# Altium PCB PCB1.PcbDoc (part 1 of 8)
Units mil, origin at the board's own origin, x right, y up, seen from the top; angles counter-clockwise.
Board outline 3820 x 2600 mil, 2 copper layers (Top Layer, Bottom Layer); 88 components, 130 nets, 566 pads, 113 vias.
Unrouted connection lines stored in the file: 16.
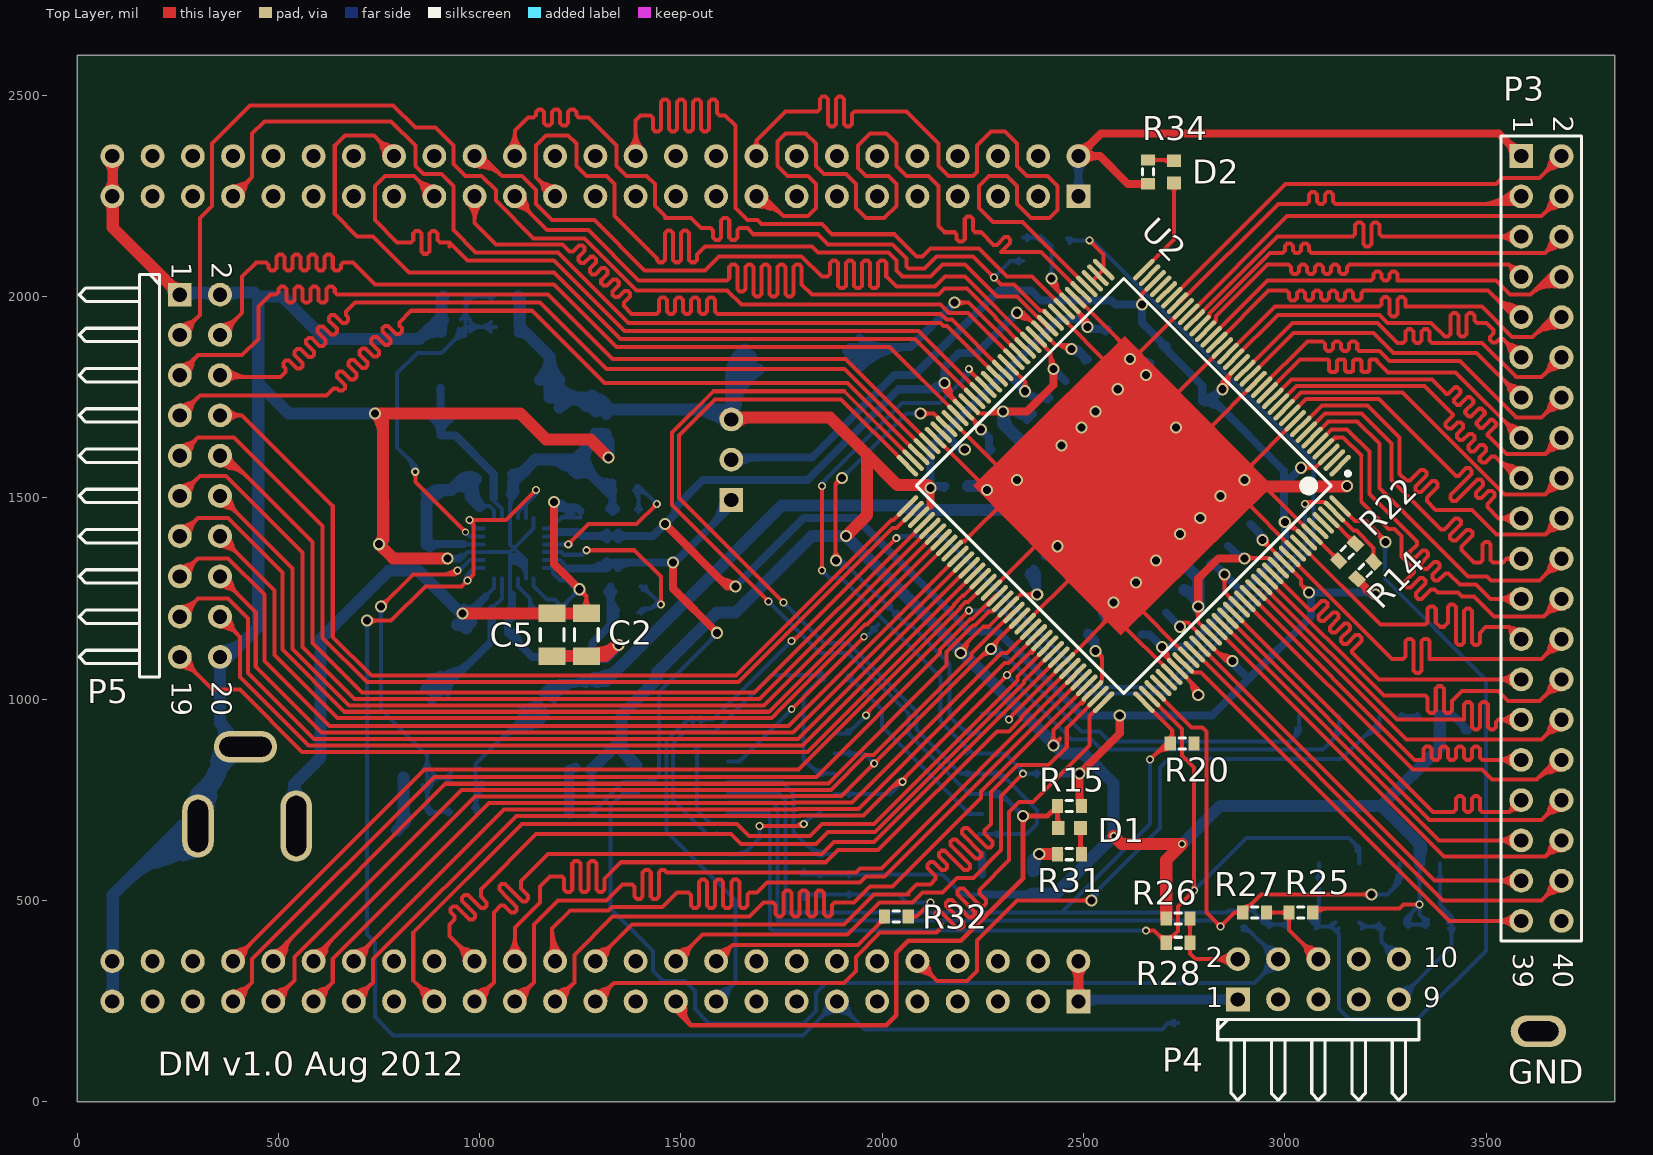
[diagram p0: Top Layer view]
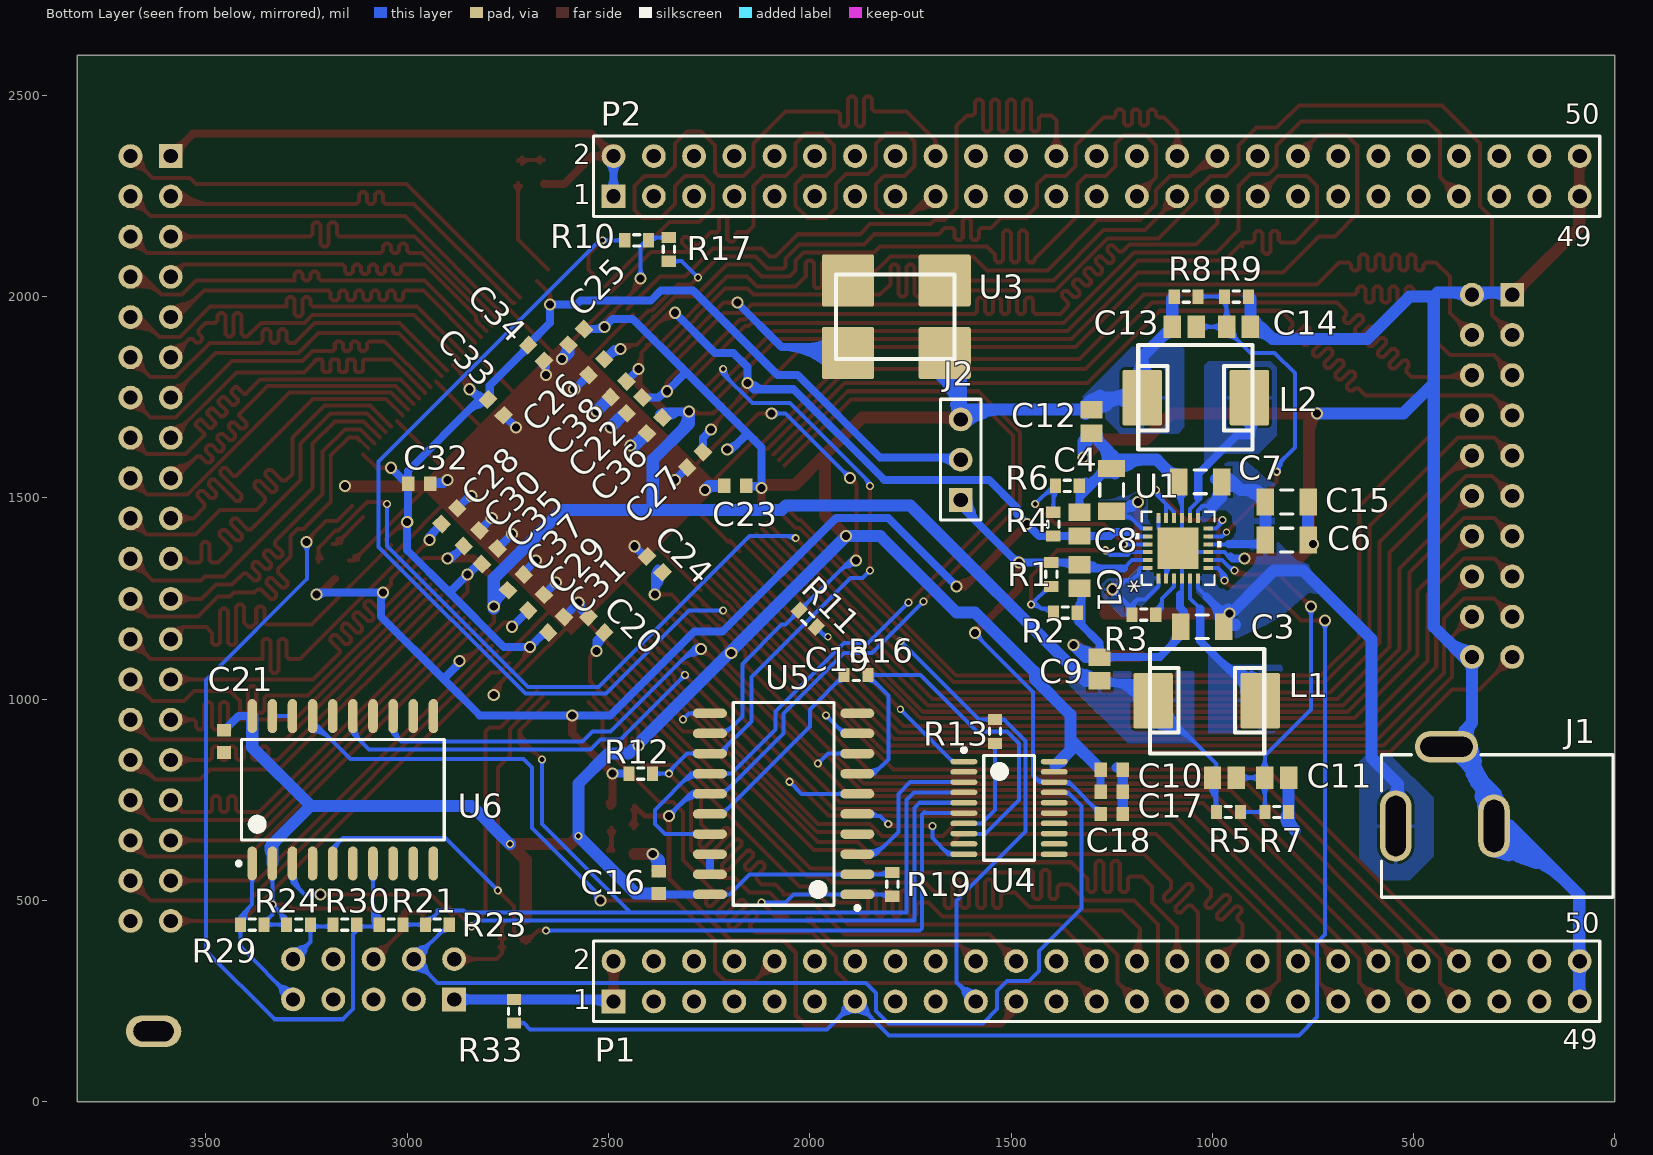
[diagram p1: Bottom Layer view, seen from below]

## Layer stack, top to bottom
Top Layer: signal copper 1.4
Dielectric: dielectric 12.6, FR-4, Dk 4.8
Bottom Layer: signal copper 1.4

## Board outline
0,0 0,2600 3820,2600 3820,0

## Design rules (kind name [scope] priority, off if disabled: settings)
Clearance [All] p1: gap=6
DiffPairsRouting [All] p1: maxlimit=10 minlimit=10 mostfreqgap=10 maxuncoupledlength=500
MatchedLengths MatchedLengths_DIO [InNetClass('DIO')] p1: tolerance=196.85 checknetsindiffpair=TRUE checkdiffpairvsdiffpair=TRUE checkothers=TRUE
MatchedLengths MatchedLengths_FSMC [InNetClass('FSMC')] p2: tolerance=196.85 checknetsindiffpair=TRUE checkdiffpairvsdiffpair=TRUE checkothers=TRUE
MatchedLengths MatchedLengths_ADC2 [InNetClass('ADC2')] p3: tolerance=196.85 checknetsindiffpair=TRUE checkdiffpairvsdiffpair=TRUE checkothers=TRUE
MatchedLengths MatchedLengths_ADC1 [InNetClass('ADC1')] p4: tolerance=196.85 checknetsindiffpair=TRUE checkdiffpairvsdiffpair=TRUE checkothers=TRUE
PolygonConnect [All] p1: connectstyle=Relief reliefconductorwidth=10 reliefentries=4 polygonreliefangle="90 Angle"
RoutingVias [All] p1: holewidth=31.5 width=19.68 viastyle="Through Hole" minholewidth=11.81 minwidth=15.75 maxholewidth=28 maxwidth=50
SilkscreenOverComponentPads [All] p1: minsilkscreentomaskgap=10
SolderMaskExpansion [All] p1: expansion=4
Width [All] p1: maxlimit=60 minlimit=6 preferedwidth=10
26 further rules are at their usual default settings.

## Classes and differential pairs
net class FSMC: FSMC_CLK FSMC_D0 FSMC_D1 FSMC_D2 FSMC_D3 FSMC_D4 FSMC_D5 FSMC_D6 FSMC_D7 FSMC_D8 FSMC_D9 FSMC_D10 FSMC_D11 FSMC_D12 FSMC_D13 FSMC_D14 FSMC_D15 FSMC_NBL0 FSMC_NBL1 FSMC_NE1 FSMC_NL FSMC_NOE FSMC_NWAIT FSMC_NWE
net class ADC2: ADC2_CLK_N ADC2_CLK_P ADC2_D0 ADC2_D1 ADC2_D2 ADC2_D3 ADC2_D4 ADC2_D5 ADC2_D6 ADC2_D7 ADC2_D8 ADC2_D9 ADC2_D10 ADC2_D11 ADC2_D12 ADC2_D13 ADC2_D14 ADC2_D15 ADC2_OF
net class ADC1: ADC1_CLK_N ADC1_CLK_P ADC1_D0 ADC1_D1 ADC1_D2 ADC1_D3 ADC1_D4 ADC1_D5 ADC1_D6 ADC1_D7 ADC1_D8 ADC1_D9 ADC1_D10 ADC1_D11 ADC1_D12 ADC1_D13 ADC1_D14 ADC1_D15 ADC1_OF
net class DIO: DIO_CLK DIO_D0 DIO_D1 DIO_D2 DIO_D3 DIO_D4 DIO_D5 DIO_D6 DIO_D7 DIO_D8 DIO_D9 DIO_D10 DIO_D11 DIO_D12 DIO_D13 DIO_D14 DIO_D15
component class DM_V1_power: C1 C2 C3 C4 C5 C6 C7 C8 C9 C10 C11 C12 C13 C14 C15 J1 L1 L2 R1 R2 R3 R4 R5 R6 R7 R8 R9 R33 U1
component class DM_V1_JTAG_CONF_connectors: C16 C17 C18 C19 C21 D1 P4 R10 R11 R12 R13 R14 R15 R16 R19 R20 R21 R22 R23 R24 R25 R26 R27 R28 R29 R30 R31 U4 U5 U6
component class DM_V1_headers_misc: P1 P2 P3 P5 R17 R32 U3
component class DM_V1_FPGA: C20 C22 C23 C24 C25 C26 C27 C28 C29 C30 C31 C32 C33 C34 C35 C36 C37 C38 D2 J2 R34 U2
differential pair ADC1_CLK: +ADC1_CLK_P -ADC1_CLK_N
differential pair ADC2_CLK: +ADC2_CLK_P -ADC2_CLK_N

## Components (designator, comment, footprint, x,y, rotation, side; value= is the part's Value field where it differs from the comment)
C1 "Cap Semi" C0805 1330,1305 r90 bottom
C2 "Cap Pol3" C1206 1265,1160 r270 top
C3 "Cap Pol3" C1206 1025,1180 r0 bottom
C4 "Cap Pol3" C1206 1250,1520 r90 bottom
C5 "Cap Pol3" C1206 1180,1160 r270 top
C6 "Cap Pol3" C1206 815,1395 r180 bottom
C7 "Cap Pol3" C1206 1030,1540 r0 bottom
C8 "Cap Semi" C0805 1330,1435 r270 bottom
C9 "Cap Semi" C0805 1280,1075 r270 bottom
C10 "Cap Semi" C0805 970,805 r0 bottom
C11 "Cap Semi" C0805 840,805 r0 bottom
C12 "Cap Semi" C0805 1300,1690 r90 bottom
C13 "Cap Semi" C0805 1070,1925 r0 bottom
C14 "Cap Semi" C0805 935,1925 r0 bottom
C15 "Cap Pol3" C1206 815,1490 r180 bottom
C16 "0.1" 1608[0603] 2375,545 r90 bottom
C17 "0.1" 1608[0603] 1250,770 r0 bottom
C18 "0.1" 1608[0603] 1250,715 r180 bottom
C19 "0.1" 1608[0603] 1250,825 r0 bottom
C20 "0.1" 1608[0603] 2530,1185 r225 bottom
C21 "0.1" 1608[0603] 3455,895 r270 bottom
C22 "0.1" 1608[0603] 2435,1730 r135 bottom
C23 "0.1" 1608[0603] 2185,1530 r180 bottom
C24 "0.1" 1608[0603] 2385,1335 r225 bottom
C25 "0.1" 1608[0603] 2580,1900 r135 bottom
C26 "0.1" 1608[0603] 2530,1825 r135 bottom
C27 "0.1" 1608[0603] 2285,1595 r135 bottom
C28 "0.1" 1608[0603] 2895,1455 r315 bottom
C29 "0.1" 1608[0603] 2680,1240 r315 bottom
C30 "0.1" 1608[0603] 2795,1355 r315 bottom
C31 "0.1" 1608[0603] 2630,1185 r315 bottom
C32 "0.1" 1608[0603] 2970,1535 r0 bottom
C33 "0.1" 1608[0603] 2780,1725 r45 bottom
C34 "0.1" 1608[0603] 2680,1860 r45 bottom
C35 "0.1" 1608[0603] 2840,1400 r315 bottom
C36 "0.1" 1608[0603] 2385,1680 r135 bottom
C37 "0.1" 1608[0603] 2730,1290 r315 bottom
C38 "0.1" 1608[0603] 2475,1770 r135 bottom
D1 "LED" 1608[0603] 2465,680 r0 top
D2 "LED" 1608[0603] 2725,2310 r90 top
J1 "PWR2.5" KLD-0202 5,685 r0 bottom
J2 "Header 3" HDR1X3 1625,1495 r90 bottom
L1 "Inductor Iron" "Coil inductor" 1155,865 r180 bottom
L2 "Inductor Iron" "Coil inductor" 900,1880 r0 bottom
P1 "Header 25X2" HDR2X25 2487.4,249.21 r180 bottom
P2 "Header 25X2" HDR2X25 2487.4,2249.21 r180 bottom
P3 "Header 20X2" HDR2X20 3587.4,2349.21 r270 top
P4 "Header 5X2H" HDR2X5H 2883.46,254.21 r0 top
P5 "Header 10X2H" HDR2X10H 255,2005 r270 top
R1 "Res3" J1-0603 1400,1310 r90 bottom
R2 "Res3" J1-0603 1365,1215 r0 bottom
R3 "Res3" J1-0603 1170,1210 r0 bottom
R4 "Res3" J1-0603 1395,1435 r270 bottom
R5 "Res3" J1-0603 960,720 r0 bottom
R6 "Res3" J1-0603 1360,1530 r0 bottom
R7 "Res3" J1-0603 840,720 r0 bottom
R8 "Res3" J1-0603 1065,2000 r0 bottom
R9 "Res3" J1-0603 940,2000 r0 bottom
R10 "Res3" J1-0603 2430,2140 r180 bottom
R11 "Res3" J1-0603 2005,1200 r45 bottom
R12 "Res3" J1-0603 2420,815 r0 bottom
R13 "Res3" J1-0603 1540,920 r90 bottom
R14 "Res3" J1-0603 3200,1320 r225 top
R15 "Res3" J1-0603 2465,735 r0 top
R16 "Res3" J1-0603 1885,1060 r0 bottom
R17 "Res3" J1-0603 2350,2117.56 r270 bottom
R19 "Res3" J1-0603 1795,540 r270 bottom
R20 "Res3" J1-0603 2745,890 r0 top
R21 "Res3" J1-0603 3040,440 r0 bottom
R22 "Res3" J1-0603 3155,1365 r45 top
R23 "Res3" J1-0603 2925,440 r180 bottom
R24 "Res3" J1-0603 3270,440 r180 bottom
R25 "Res3" J1-0603 3040,470 r180 top
R26 "Res3" J1-0603 2735,455 r0 top
R27 "Res3" J1-0603 2925,470 r0 top
R28 "Res3" J1-0603 2735,395 r0 top
R29 "Res3" J1-0603 3385,440 r0 bottom
R30 "Res3" J1-0603 3155,440 r0 bottom
R31 "Res3" J1-0603 2465,615 r0 top
R32 "Res3" J1-0603 2035,460 r180 top
R33 "Res3" J1-0603 2735,225 r270 bottom
R34 "Res3" J1-0603 2660,2310 r270 top
U1 "LM26480_RTW_24" SQA24A 1085,1375 r90 bottom
U2 "XC3S400-4TQG144C" TQG144_N 2600,1530 r225 top
U3 "ActiveOsc5x7" ACT_OSC 1885,1870 r180 bottom
U4 "XCF02SVOG20C" VOG20_N 1505,730 r180 bottom
U5 "74HC244D" SOP127P1030X265-20N 2065,740 r0 bottom
U6 "74HC244D" SOP127P1030X265-20N 3160,775 r90 bottom

## Footprints (in the part's own frame and the unit in brackets; to place one, negate y for a bottom-side part, rotate by r counter-clockwise, add the part's x,y. Pads: shape width x height; smd on the part's side, far side on the other; paste and mask are expansions set on the pad)
1608[0603] [mm] "Chip Capacitor, Body 1.6x0.8mm, IPC High Density"
  rect 0.8x0.9 smd: 1(-0.7,0) 2(0.7,0)
  body extent -0.87,-0.48 0.87,0.48, height 1.3
ACT_OSC [mil] "Active_oscillator"
  rrect10% 130x130 smd: 1(220,170) 2(-20,170) 3(-20,-10) 4(220,-10)
  silkscreen extent -50,-25 245,185
C0805 [mm] "Chip Capacitor, Body 2.0x1.3mm, IPC High Density"
  rect 1.1x1.4 smd: 1(-0.75,0) 2(0.75,0)
  body extent -1.1,-0.72 1.1,0.72, height 1.4
C1206 [mm] "Chip Capacitor, Body 3.2x1.6mm, IPC High Density"
  rect 1.1x1.7 smd: 1(-1.35,0) 2(1.35,0)
  silkscreen extent -0.4,-0.75 0.4,0.75, body extent -1.7,-0.9 1.7,0.9, height 1.3
"Coil inductor" [mil] "High-current coil inductor"
  rrect10% 98.43x137.8 smd: 1(8,131) 2(274,131)
  silkscreen extent 0,0 284,260
HDR1X3 [mm] "Connector; Header; 3 Position"
  rect 1.5x1.5 hole 0.9: 1(0,0)
  round 1.5 hole 0.9: 2(2.54,0) 3(5.08,0)
  silkscreen extent -1.27,-1.27 6.35,1.27
HDR2X5H [mm] "Connector; Header; 5x2 Position; Right Angle"
  rect 1.5x1.5 hole 0.9: 1(0,0)
  round 1.5 hole 0.9: 2(0,2.54) 3(2.54,0) 4(2.54,2.54) 5(5.08,0) 6(5.08,2.54) 7(7.62,0) 8(7.62,2.54) 9(10.16,0) 10(10.16,2.54)
  silkscreen extent -1.27,-6.35 11.43,-1.27
HDR2X10H [mm] "Connector; Header; 10x2 Position; Right Angle"
  rect 1.5x1.5 hole 0.9: 1(0,0)
  round 1.5 hole 0.9: 2(0,2.54) 3(2.54,0) 4(2.54,2.54) 5(5.08,0) 6(5.08,2.54) 7(7.62,0) 8(7.62,2.54) 9(10.16,0) 10(10.16,2.54) 11(12.7,0) 12(12.7,2.54) 13(15.24,0) 14(15.24,2.54) 15(17.78,0) 16(17.78,2.54) 17(20.32,0) 18(20.32,2.54) 19(22.86,0) 20(22.86,2.54)
  silkscreen extent -1.27,-6.35 24.13,-1.27
HDR2X20 [mm] "Connector; Header; 20x2 Position"
  rect 1.5x1.5 hole 0.9: 1(0,0)
  round 1.5 hole 0.9: 2(0,2.54) 3(2.54,0) 4(2.54,2.54) 5(5.08,0) 6(5.08,2.54) 7(7.62,0) 8(7.62,2.54) 9(10.16,0) 10(10.16,2.54) 11(12.7,0) 12(12.7,2.54) 13(15.24,0) 14(15.24,2.54) 15(17.78,0) 16(17.78,2.54) 17(20.32,0) 18(20.32,2.54) 19(22.86,0) 20(22.86,2.54) 21(25.4,0) 22(25.4,2.54) 23(27.94,0) 24(27.94,2.54) 25(30.48,0) 26(30.48,2.54) 27(33.02,0) 28(33.02,2.54) 29(35.56,0) 30(35.56,2.54) 31(38.1,0) 32(38.1,2.54) 33(40.64,0) 34(40.64,2.54) 35(43.18,0) 36(43.18,2.54) 37(45.72,0) 38(45.72,2.54) 39(48.26,0) 40(48.26,2.54)
  silkscreen extent -1.27,-1.27 49.53,3.81
HDR2X25 [mm] "Connector; Header; 25x2 Position"
  rect 1.5x1.5 hole 0.9: 1(0,0)
  round 1.5 hole 0.9: 2(0,2.54) 3(2.54,0) 4(2.54,2.54) 5(5.08,0) 6(5.08,2.54) 7(7.62,0) 8(7.62,2.54) 9(10.16,0) 10(10.16,2.54) 11(12.7,0) 12(12.7,2.54) 13(15.24,0) 14(15.24,2.54) 15(17.78,0) 16(17.78,2.54) 17(20.32,0) 18(20.32,2.54) 19(22.86,0) 20(22.86,2.54) 21(25.4,0) 22(25.4,2.54) 23(27.94,0) 24(27.94,2.54) 25(30.48,0) 26(30.48,2.54) 27(33.02,0) 28(33.02,2.54) 29(35.56,0) 30(35.56,2.54) 31(38.1,0) 32(38.1,2.54) 33(40.64,0) 34(40.64,2.54) 35(43.18,0) 36(43.18,2.54) 37(45.72,0) 38(45.72,2.54) 39(48.26,0) 40(48.26,2.54) 41(50.8,0) 42(50.8,2.54) 43(53.34,0) 44(53.34,2.54) 45(55.88,0) 46(55.88,2.54) 47(58.42,0) 48(58.42,2.54) 49(60.96,0) 50(60.96,2.54)
  silkscreen extent -1.27,-1.27 62.23,3.81
J1-0603 [mm] "Chip Resistor, Body 1.6x0.8mm, IPC High Density"
  rect 0.7x0.9 smd: 1(-0.75,0) 2(0.75,0)
  silkscreen extent -0.2,-0.35 0.2,0.35, body extent -0.85,-0.48 0.85,0.48, height 0.9
KLD-0202 [mm] "DC Power Jack, 2.5mm, KLD Series, PCB Mount"
  oval 2x4.5 hole 1.27 slot 3.81 at 90 deg: 1(13.7,0)
  round 1.5 hole 1: 1A(13.7,-1.25) 1B(13.7,1.25) 2A(7.5,-1) 2B(7.5,1) 3A(9.5,-5) 3B(11.5,-5)
  oval 2x4 hole 1.27 slot 3.302 at 90 deg: 2(7.5,0)
  oval 4x2 hole 1.27 slot 3.302 at 0 deg: 3(10.5,-5)
  silkscreen extent 0,-4.5 14.6,4.5
SOP127P1030X265-20N [mm] "SOP, 20-Leads, Body 12.8x7.5mm (max), Pitch 1.27mm, IPC Medium Density"
  oval 2.15x0.6 smd: 1(-4.65,5.715) 2(-4.65,4.445) 3(-4.65,3.175) 4(-4.65,1.905) 5(-4.65,0.635) 6(-4.65,-0.635) 7(-4.65,-1.905) 8(-4.65,-3.175) 9(-4.65,-4.445) 10(-4.65,-5.715) 11(4.65,-5.715) 12(4.65,-4.445) 13(4.65,-3.175) 14(4.65,-1.905) 15(4.65,-0.635) 16(4.65,0.635) 17(4.65,1.905) 18(4.65,3.175) 19(4.65,4.445) 20(4.65,5.715)
  silkscreen extent -4.77,-6.4 3.17,6.69, body extent -3.75,-6.4 3.75,6.4, height 2.65
SQA24A [mil]
  rect 24x10 smd paste-5: 1(-75,49.21) 2(-75,29.53) 3(-75,9.84) 4(-75,-9.84) 5(-75,-29.53) 6(-75,-49.21) 13(75,-49.21) 14(75,-29.53) 15(75,-9.84) 16(75,9.84) 17(75,29.53) 18(75,49.21)
  rect 10x24 smd paste-5: 7(-49.21,-75) 8(-29.53,-75) 9(-9.84,-75) 10(9.84,-75) 11(29.53,-75) 12(49.21,-75) 19(49.21,75) 20(29.53,75) 21(9.84,75) 22(-9.84,75) 23(-29.53,75) 24(-49.21,75)
  rect 102x102 smd paste-51: 25(0,0)
  silkscreen extent -90,-107 90,107
TQG144_N [mm] "Thin QFP, 144-Leads, Body 20x20mm, Pitch 0.5mm, IPC Medium Density"
  oval 1.8x0.3 smd: 1(-10.55,8.75) 2(-10.55,8.25) 3(-10.55,7.75) 4(-10.55,7.25) 5(-10.55,6.75) 6(-10.55,6.25) 7(-10.55,5.75) 8(-10.55,5.25) 9(-10.55,4.75) 10(-10.55,4.25) 11(-10.55,3.75) 12(-10.55,3.25) 13(-10.55,2.75) 14(-10.55,2.25) 15(-10.55,1.75) 16(-10.55,1.25) 17(-10.55,0.75) 18(-10.55,0.25) 19(-10.55,-0.25) 20(-10.55,-0.75) 21(-10.55,-1.25) 22(-10.55,-1.75) 23(-10.55,-2.25) 24(-10.55,-2.75) 25(-10.55,-3.25) 26(-10.55,-3.75) 27(-10.55,-4.25) 28(-10.55,-4.75) 29(-10.55,-5.25) 30(-10.55,-5.75) 31(-10.55,-6.25) 32(-10.55,-6.75) 33(-10.55,-7.25) 34(-10.55,-7.75) 35(-10.55,-8.25) 36(-10.55,-8.75) 73(10.55,-8.75) 74(10.55,-8.25) 75(10.55,-7.75) 76(10.55,-7.25) 77(10.55,-6.75) 78(10.55,-6.25) 79(10.55,-5.75) 80(10.55,-5.25) 81(10.55,-4.75) 82(10.55,-4.25) 83(10.55,-3.75) 84(10.55,-3.25) 85(10.55,-2.75) 86(10.55,-2.25) 87(10.55,-1.75) 88(10.55,-1.25) 89(10.55,-0.75) 90(10.55,-0.25) 91(10.55,0.25) 92(10.55,0.75) 93(10.55,1.25) 94(10.55,1.75) 95(10.55,2.25) 96(10.55,2.75) 97(10.55,3.25) 98(10.55,3.75) 99(10.55,4.25) 100(10.55,4.75) 101(10.55,5.25) 102(10.55,5.75) 103(10.55,6.25) 104(10.55,6.75) 105(10.55,7.25) 106(10.55,7.75) 107(10.55,8.25) 108(10.55,8.75)
  oval 0.3x1.8 smd: 37(-8.75,-10.55) 38(-8.25,-10.55) 39(-7.75,-10.55) 40(-7.25,-10.55) 41(-6.75,-10.55) 42(-6.25,-10.55) 43(-5.75,-10.55) 44(-5.25,-10.55) 45(-4.75,-10.55) 46(-4.25,-10.55) 47(-3.75,-10.55) 48(-3.25,-10.55) 49(-2.75,-10.55) 50(-2.25,-10.55) 51(-1.75,-10.55) 52(-1.25,-10.55) 53(-0.75,-10.55) 54(-0.25,-10.55) 55(0.25,-10.55) 56(0.75,-10.55) 57(1.25,-10.55) 58(1.75,-10.55) 59(2.25,-10.55) 60(2.75,-10.55) 61(3.25,-10.55) 62(3.75,-10.55) 63(4.25,-10.55) 64(4.75,-10.55) 65(5.25,-10.55) 66(5.75,-10.55) 67(6.25,-10.55) 68(6.75,-10.55) 69(7.25,-10.55) 70(7.75,-10.55) 71(8.25,-10.55) 72(8.75,-10.55) 109(8.75,10.55) 110(8.25,10.55) 111(7.75,10.55) 112(7.25,10.55) 113(6.75,10.55) 114(6.25,10.55) 115(5.75,10.55) 116(5.25,10.55) 117(4.75,10.55) 118(4.25,10.55) 119(3.75,10.55) 120(3.25,10.55) 121(2.75,10.55) 122(2.25,10.55) 123(1.75,10.55) 124(1.25,10.55) 125(0.75,10.55) 126(0.25,10.55) 127(-0.25,10.55) 128(-0.75,10.55) 129(-1.25,10.55) 130(-1.75,10.55) 131(-2.25,10.55) 132(-2.75,10.55) 133(-3.25,10.55) 134(-3.75,10.55) 135(-4.25,10.55) 136(-4.75,10.55) 137(-5.25,10.55) 138(-5.75,10.55) 139(-6.25,10.55) 140(-6.75,10.55) 141(-7.25,10.55) 142(-7.75,10.55) 143(-8.25,10.55) 144(-8.75,10.55)
  silkscreen extent -10.67,-9.25 9.25,9.57, body extent -10,-10 10,10, height 1.6
VOG20_N [mm] "TSOP, 20-Leads, Body 6.5x4.4mm, Pitch 0.65mm, IPC Medium Density"
  oval 1.7x0.35 smd: 1(-2.85,2.925) 2(-2.85,2.275) 3(-2.85,1.625) 4(-2.85,0.975) 5(-2.85,0.325) 6(-2.85,-0.325) 7(-2.85,-0.975) 8(-2.85,-1.625) 9(-2.85,-2.275) 10(-2.85,-2.925) 11(2.85,-2.925) 12(2.85,-2.275) 13(2.85,-1.625) 14(2.85,-0.975) 15(2.85,-0.325) 16(2.85,0.325) 17(2.85,0.975) 18(2.85,1.625) 19(2.85,2.275) 20(2.85,2.925)
  silkscreen extent -2.98,-3.3 1.6,3.77, body extent -2.25,-3.3 2.25,3.3, height 1.2

## Part data
C1 C8 C9 C10 C11 C12 C13 C14: "Capacitor (Semiconductor SIM Model)"
C2 C3 C4 C5 C6 C7 C15: "Polarized Capacitor (Surface Mount)"
C16 C17 C18 C19 C20 C21 C22 C23 C24 C25 C26 C27 C28 C29 C30 C31 C32 C33 C34 C35 C36 C37 C38: library part "CC0603-0.1MKF X7R", "Ceramic Chip-capacitor 0603"
D1 D2: library part LED2, "Typical RED, GREEN, YELLOW, AMBER GaAs LED"
J1: "Low Voltage Power Supply Connector"
J2: "Header, 3-Pin"
L1 L2: "Magnetic-Core Inductor"
P1 P2: "Header, 25-Pin, Dual row"
P3: "Header, 20-Pin, Dual row"
P4: "Header, 5-Pin, Dual row, Right Angle"
P5: "Header, 10-Pin, Dual row, Right Angle"
R1 R2 R3 R4 R5 R6 R7 R8 R9 R10 R11 R12 R13 R14 R15 R16 R17 R19 R20 R21 R22 R23 R24 R25 R26 R27 R28 R29 R30 R31 R32 R33 R34: "Resistor"
U1: "Imported"
U2: "Spartan-3 1.2V FPGA, 97 User I/Os, 144-Pin TQFP, Standard Performance, Commercial Grade, Pb-Free"
U4: "XCF00S Series, Platform Flash In-System Programmable Configuration 3.3V PROM, 20-Pin TSOP, 2-Megabit, Commercial Grade, Pb-Free"
U5 U6: library part 74ALVC244PW, "Octal Buffer/Driver Noninverting 3-State Output"

## Free pads (board coordinates)
  rrect100% 137.8x78.74 hole 50 slot 100 at 0 deg: 0(3630,175)

## Via types
v1: diameter 30, hole 20, Top Layer to Bottom Layer, 74 vias
v2: diameter 20, hole 12, Top Layer to Bottom Layer, 36 vias
v3: diameter 17.72, hole 11.81, Top Layer to Bottom Layer, 3 vias

## Nets (pads, with @x,y where several pads share a name; then routed paths per layer and width w, separated by ;. In a path a pad name is that pad's centre, name@x,y a point inside that pad or via, vN(x,y) a via of type N, cw(c..) or ccw(c..) an arc to the next point about the centre after c; other vN are vias at no path point)
+1.2V: C9.2 C10.2 C35.2 C36.2 C37.2 C38.2 L1.1 R5.2 U2.49 U2.61 U2.121 U2.133 | length 11650.9
  Top Layer w10: U2.61@2215.82,1733.22 2239.69,1709.36 2294.36,1709.36 v1(2300,1715) ; U2.49@2382.86,1900.26 2382.86,1896.33 2417.5,1861.68 ; v1@2417.5,1827.5 2417.5,1861.68 ; v1(2785,1230) 2785,1191.89 U2.121@2817.14,1159.74 ; v1(2900,1350) 2900.64,1350.64 2960.31,1350.64 U2.133@2984.18,1326.78 ; U2.61@2237.34,1712.99 ccw(c2246.1,1721.74) 2246.1,1709.36 ; U2.61@2237.34,1712.99 ccw(c2246.1,1721.74) 2246.1,1709.36 ; U2.61@2237.34,1712.99 ccw(c2246.1,1721.74) 2246.1,1709.36 ; 2262.24,1709.36 ccw(c2262.24,1752.76) v1@2292.93,1722.07 ; 2262.24,1709.36 ccw(c2262.24,1752.76) v1@2292.93,1722.07 ; 2262.24,1709.36 ccw(c2262.24,1752.76) v1@2292.93,1722.07 ; U2.49@2404.64,1879.38 ccw(c2416.32,1879.38) 2408.06,1871.12 ; U2.49@2404.64,1879.38 ccw(c2416.32,1879.38) 2408.06,1871.12 ; U2.49@2404.64,1879.38 ccw(c2416.32,1879.38) 2408.06,1871.12 ; 2417.5,1837.86 ccw(c2442.52,1837.86) v1(2425,1820) ; 2417.5,1837.86 ccw(c2442.52,1837.86) v1(2425,1820) ; 2417.5,1837.86 ccw(c2442.52,1837.86) v1(2425,1820) ; 2417.5,1861.68 ccw(c2465.89,1861.68) v1@2432,1827.14 ; 2417.5,1861.68 ccw(c2465.89,1861.68) v1@2432,1827.14 ; 2417.5,1861.68 ccw(c2465.89,1861.68) v1@2432,1827.14 ; v1@2418.88,1827.91 ccw(c2411.23,1837.77) 2421.98,1844.12 ; v1@2418.88,1827.91 ccw(c2411.23,1837.77) 2421.98,1844.12 ; v1@2418.88,1827.91 ccw(c2411.23,1837.77) 2421.98,1844.12 ; v1@2777.93,1222.93 cw(c2760.86,1205.86) 2785,1205.86 ; v1@2777.93,1222.93 cw(c2760.86,1205.86) 2785,1205.86 ; v1@2777.93,1222.93 cw(c2760.86,1205.86) 2785,1205.86 ; 2785,1205.86 cw(c2809.14,1205.86) v1@2792.07,1222.93 ; 2785,1205.86 cw(c2809.14,1205.86) v1@2792.07,1222.93 ; 2785,1205.86 cw(c2809.14,1205.86) v1@2792.07,1222.93 ; v1@2907.07,1342.93 cw(c2925.69,1324.31) 2925.69,1350.64 ; v1@2907.07,1342.93 cw(c2925.69,1324.31) 2925.69,1350.64 ; v1@2907.07,1342.93 cw(c2925.69,1324.31) 2925.69,1350.64 ; v1@2907.07,1357.07 ccw(c2922.6,1372.6) 2922.6,1350.64 ; v1@2907.07,1357.07 ccw(c2922.6,1372.6) 2922.6,1350.64 ; v1@2907.07,1357.07 ccw(c2922.6,1372.6) 2922.6,1350.64 ; 2953.9,1350.64 cw(c2953.9,1338.26) U2.133@2962.66,1347.01 ; 2953.9,1350.64 cw(c2953.9,1338.26) U2.133@2962.66,1347.01 ; 2953.9,1350.64 cw(c2953.9,1338.26) U2.133@2962.66,1347.01
  Top Layer w20: v1(2300,1715) 2360,1715 2425,1780 v1(2425,1820) ; v1(2785,1230) 2785,1300 2835,1350 v1(2900,1350)
  Bottom Layer w10: R5.2@989.53,720 989.53,805 989.53,838.92 ; L1.1@1163,980 L1.1@1147,996 ; R5.2@983.32,730.15 ccw(c968.33,745.13) 989.53,745.13 ; R5.2@983.32,730.15 ccw(c968.33,745.13) 989.53,745.13 ; R5.2@983.32,730.15 ccw(c968.33,745.13) 989.53,745.13 ; R5.2@984.85,731.37 ccw(c977.92,742.38) 990.61,739.49 ; R5.2@984.85,731.37 ccw(c977.92,742.38) 990.61,739.49 ; R5.2@984.85,731.37 ccw(c977.92,742.38) 990.61,739.49 ; R5.2@984.85,731.37 ccw(c977.92,742.38) 990.61,739.49 ; R5.2@984.85,731.37 ccw(c977.92,742.38) 990.61,739.49 ; R5.2@989.53,734.75 cw(c1063.87,734.75) C10.2@1011.3,787.32 ; R5.2@989.53,734.75 cw(c1063.87,734.75) C10.2@1011.3,787.32 ; R5.2@989.53,734.75 cw(c1063.87,734.75) C10.2@1011.3,787.32 ; 989.53,745.13 ccw(c1010.72,745.13) R5.2@995.74,730.15 ; 989.53,745.13 ccw(c1010.72,745.13) R5.2@995.74,730.15 ; 989.53,745.13 ccw(c1010.72,745.13) R5.2@995.74,730.15 ; 989.53,758.89 cw(c1039.73,758.89) C10.2@1004.23,794.39 ; 989.53,758.89 cw(c1039.73,758.89) C10.2@1004.23,794.39 ; 989.53,758.89 cw(c1039.73,758.89) C10.2@1004.23,794.39 ; 989.53,838.92 ccw(c1000.93,838.92) C10.2@1000.36,827.54 ; 989.53,838.92 ccw(c1000.93,838.92) C10.2@1000.36,827.54 ; 989.53,838.92 ccw(c1000.93,838.92) C10.2@1000.36,827.54 ; 989.53,838.92 1146.6,996 L1.1@1147,996 ; C10.2@990.64,785.01 cw(c986.72,778.78) 993.09,775.1 ; C10.2@990.64,785.01 cw(c986.72,778.78) 993.09,775.1 ; C10.2@990.64,785.01 cw(c986.72,778.78) 993.09,775.1 ; C10.2@990.87,784.87 cw(c982.1,770.46) 996.71,762.03 ; C10.2@990.87,784.87 cw(c982.1,770.46) 996.71,762.03 ; C10.2@990.87,784.87 cw(c982.1,770.46) 996.71,762.03 ; 993.09,775.1 cw(c1007.48,766.79) C10.2@1003.51,782.92 ; 993.09,775.1 cw(c1007.48,766.79) C10.2@1003.51,782.92 ; 993.09,775.1 cw(c1007.48,766.79) C10.2@1003.51,782.92 ; 993.17,750.78 ccw(c1021.82,744.27) R5.2@996.96,728.61 ; 993.17,750.78 ccw(c1021.82,744.27) R5.2@996.96,728.61 ; 993.17,750.78 ccw(c1021.82,744.27) R5.2@996.96,728.61 ; 993.17,750.78 ccw(c1021.82,744.27) R5.2@996.96,728.61 ; 993.17,750.78 ccw(c1021.82,744.27) R5.2@996.96,728.61 ; C10.2@996.07,793.41 cw(c987.42,779.21) 1001.82,770.9 ; C10.2@996.07,793.41 cw(c987.42,779.21) 1001.82,770.9 ; C10.2@996.07,793.41 cw(c987.42,779.21) 1001.82,770.9 ; 1037.24,886.64 cw(c1147,776.88) L1.1@1147,932.1 ; 1037.24,886.64 cw(c1147,776.88) L1.1@1147,932.1 ; 1037.24,886.64 cw(c1147,776.88) L1.1@1147,932.1 ; 1054.31,903.71 cw(c1147,811.02) L1.1@1147,942.1 ; 1054.31,903.71 cw(c1147,811.02) L1.1@1147,942.1 ; 1054.31,903.71 cw(c1147,811.02) L1.1@1147,942.1 ; 1071.38,920.78 cw(c1147,845.17) L1.1@1147,952.1 ; 1071.38,920.78 cw(c1147,845.17) L1.1@1147,952.1 ; 1071.38,920.78 cw(c1147,845.17) L1.1@1147,952.1 ; 1085.72,935.12 ccw(c1044.53,976.32) L1.1@1102.79,976.32 ; 1085.72,935.12 ccw(c1044.53,976.32) L1.1@1102.79,976.32 ; 1085.72,935.12 ccw(c1044.53,976.32) L1.1@1102.79,976.32 ; 1086.55,918.24 ccw(c1065.59,1009.6) L1.1@1152.36,974.12 ; 1086.55,918.24 ccw(c1065.59,1009.6) L1.1@1152.36,974.12 ; 1086.55,918.24 ccw(c1065.59,1009.6) L1.1@1152.36,974.12 ; 1088.46,937.85 cw(c1147,879.31) L1.1@1147,962.1 ; 1088.46,937.85 cw(c1147,879.31) L1.1@1147,962.1 ; 1088.46,937.85 cw(c1147,879.31) L1.1@1147,962.1 ; 1093.16,927.68 ccw(c1074.94,995.68) L1.1@1142.93,977.41 ; 1093.16,927.68 ccw(c1074.94,995.68) L1.1@1142.93,977.41 ; 1093.16,927.68 ccw(c1074.94,995.68) L1.1@1142.93,977.41 ; 1096.49,952.8 cw(c1147.72,939.07) L1.1@1146.7,992.1 ; 1096.49,952.8 cw(c1147.72,939.07) L1.1@1146.7,992.1 ; 1096.49,952.8 cw(c1147.72,939.07) L1.1@1146.7,992.1 ; L1.1@1098.19,939.02 ccw(c1085.89,984.9) L1.1@1132.93,978.29 ; L1.1@1098.19,939.02 ccw(c1085.89,984.9) L1.1@1132.93,978.29 ; L1.1@1098.19,939.02 ccw(c1085.89,984.9) L1.1@1132.93,978.29 ; L1.1@1102.8,952.19 ccw(c1078.67,976.32) L1.1@1112.79,976.32 ; L1.1@1102.8,952.19 ccw(c1078.67,976.32) L1.1@1112.79,976.32 ; L1.1@1102.8,952.19 ccw(c1078.67,976.32) L1.1@1112.79,976.32 ; L1.1@1104.49,940.71 cw(c1111.45,914.74) L1.1@1124.89,938.03 ; L1.1@1104.49,940.71 cw(c1111.45,914.74) L1.1@1124.89,938.03 ; L1.1@1104.49,940.71 cw(c1111.45,914.74) L1.1@1124.89,938.03 ; 1105.33,922.55 ccw(c1087.41,1000.68) L1.1@1161.61,970.34 ; 1105.33,922.55 ccw(c1087.41,1000.68) L1.1@1161.61,970.34 ; 1105.33,922.55 ccw(c1087.41,1000.68) L1.1@1161.61,970.34 ; L1.1@1109.91,932.16 ccw(c1094.28,990.49) L1.1@1152.59,974.81 ; L1.1@1109.91,932.16 ccw(c1094.28,990.49) L1.1@1152.59,974.81 ; L1.1@1109.91,932.16 ccw(c1094.28,990.49) L1.1@1152.59,974.81 ; 1124.12,926.85 ccw(c1109.23,991.76) L1.1@1170.87,966.55 ; 1124.12,926.85 ccw(c1109.23,991.76) L1.1@1170.87,966.55 ; 1124.12,926.85 ccw(c1109.23,991.76) L1.1@1170.87,966.55 ; L1.1@1147,996 1196.47,1045.47 ; L1.1@1150.58,1013.46 cw(c1208.11,977.77) 1208.11,1045.47 ; L1.1@1150.58,1013.46 cw(c1208.11,977.77) 1208.11,1045.47 ; L1.1@1150.58,1013.46 cw(c1208.11,977.77) 1208.11,1045.47 ; L1.1@1159.08,1008.19 cw(c1226.08,966.62) 1226.08,1045.47 ; L1.1@1159.08,1008.19 cw(c1226.08,966.62) 1226.08,1045.47 ; L1.1@1159.08,1008.19 cw(c1226.08,966.62) 1226.08,1045.47 ; L1.1@1167.57,1002.92 cw(c1244.05,955.47) 1244.05,1045.47 ; L1.1@1167.57,1002.92 cw(c1244.05,955.47) 1244.05,1045.47 ; L1.1@1167.57,1002.92 cw(c1244.05,955.47) 1244.05,1045.47 ; L1.1@1176.07,997.65 cw(c1262.02,944.32) C9.2@1262.02,1045.47 ; L1.1@1176.07,997.65 cw(c1262.02,944.32) C9.2@1262.02,1045.47 ; L1.1@1176.07,997.65 cw(c1262.02,944.32) C9.2@1262.02,1045.47 ; L1.1@1184.57,992.38 cw(c1280,933.17) C9.2@1280,1045.47 ; L1.1@1184.57,992.38 cw(c1280,933.17) C9.2@1280,1045.47 ; L1.1@1184.57,992.38 cw(c1280,933.17) C9.2@1280,1045.47 ; L1.1@1190.28,1024.72 cw(c1212.57,1029.37) 1196.47,1045.47 ; L1.1@1190.28,1024.72 cw(c1212.57,1029.37) 1196.47,1045.47 ; L1.1@1190.28,1024.72 cw(c1212.57,1029.37) 1196.47,1045.47 ; L1.1@1191.19,1014.28 cw(c1218.07,1013.43) 1199.66,1033.04 ; L1.1@1191.19,1014.28 cw(c1218.07,1013.43) 1199.66,1033.04 ; L1.1@1191.19,1014.28 cw(c1218.07,1013.43) 1199.66,1033.04 ; 1196.47,1045.47 C9.2@1280,1045.47 ; 1228.77,1038.84 cw(c1238.14,991.89) C9.2@1264.82,1031.64 ; 1228.77,1038.84 cw(c1238.14,991.89) C9.2@1264.82,1031.64 ; 1228.77,1038.84 cw(c1238.14,991.89) C9.2@1264.82,1031.64 ; 1228.77,1038.84 cw(c1238.14,991.89) C9.2@1264.82,1031.64 ; 1228.77,1038.84 cw(c1238.14,991.89) C9.2@1264.82,1031.64 ; 1232.09,1032.72 ccw(c1220.42,1076.58) C9.2@1259.69,1053.82 ; 1232.09,1032.72 ccw(c1220.42,1076.58) C9.2@1259.69,1053.82 ; 1232.09,1032.72 ccw(c1220.42,1076.58) C9.2@1259.69,1053.82 ; 1232.09,1032.72 ccw(c1220.42,1076.58) C9.2@1259.69,1053.82 ; 1232.09,1032.72 ccw(c1220.42,1076.58) C9.2@1259.69,1053.82 ; 1233.89,1045.47 cw(c1233.89,1005.27) C9.2@1262.32,1033.7 ; 1233.89,1045.47 ccw(c1233.89,1085.68) C9.2@1262.32,1057.25 ; 1233.89,1045.47 cw(c1233.89,1005.27) C9.2@1262.32,1033.7 ; 1233.89,1045.47 ccw(c1233.89,1085.68) C9.2@1262.32,1057.25 ; 1233.89,1045.47 ccw(c1233.89,1085.68) C9.2@1262.32,1057.25 ; 1233.89,1045.47 cw(c1233.89,1005.27) C9.2@1262.32,1033.7 ; 1239.17,1034.61 cw(c1248.18,1000.76) C9.2@1265.74,1031.06 ; 1239.17,1034.61 cw(c1248.18,1000.76) C9.2@1265.74,1031.06 ; 1239.17,1034.61 cw(c1248.18,1000.76) C9.2@1265.74,1031.06 ; 1239.17,1034.61 cw(c1248.18,1000.76) C9.2@1265.74,1031.06 ; 1239.17,1034.61 cw(c1248.18,1000.76) C9.2@1265.74,1031.06 ; 1239.8,1041.04 ccw(c1233.51,1072.55) C9.2@1260.24,1054.72 ; 1239.8,1041.04 ccw(c1233.51,1072.55) C9.2@1260.24,1054.72 ; 1239.8,1041.04 ccw(c1233.51,1072.55) C9.2@1260.24,1054.72 ; 1239.8,1041.04 ccw(c1233.51,1072.55) C9.2@1260.24,1054.72 ; 1239.8,1041.04 ccw(c1233.51,1072.55) C9.2@1260.24,1054.72 ; 1252.36,1043.54 cw(c1257.05,1020.07) C9.2@1270.39,1039.95 ; 1252.36,1043.54 cw(c1257.05,1020.07) C9.2@1270.39,1039.95 ; 1252.36,1043.54 cw(c1257.05,1020.07) C9.2@1270.39,1039.95 ; 1252.36,1043.54 cw(c1257.05,1020.07) C9.2@1270.39,1039.95 ; 1252.36,1043.54 cw(c1257.05,1020.07) C9.2@1270.39,1039.95
  Bottom Layer w20: v1(2300,1715) 2350,1715 C36.2@2365.51,1699.49 ; v1(2425,1820) C38.2@2455,1790 ; C37.2@2754.49,1270.51 v1@2785,1240 ; C35.2@2859.49,1380.51 2890,1350 v1(2900,1350) ; v1@2302.5,1710.67 cw(c2312.7,1693) 2317.98,1712.71 ; v1@2302.5,1710.67 cw(c2312.7,1693) 2317.98,1712.71 ; v1@2302.5,1710.67 cw(c2312.7,1693) 2317.98,1712.71 ; v1@2302.5,1710.67 cw(c2312.7,1693) 2317.98,1712.71 ; v1@2302.5,1710.67 cw(c2312.7,1693) 2317.98,1712.71 ; v1@2302.5,1710.67 cw(c2312.7,1693) 2317.98,1712.71 ; v1@2309.43,1715 cw(c2309.43,1643.41) C36.2@2360.06,1694.03 ; v1@2309.43,1715 cw(c2309.43,1643.41) C36.2@2360.06,1694.03 ; v1@2309.43,1715 cw(c2309.43,1643.41) C36.2@2360.06,1694.03 ; 2337.72,1706.93 ccw(c2354.14,1735.36) C36.2@2362.63,1703.65 ; 2337.72,1706.93 ccw(c2354.14,1735.36) C36.2@2362.63,1703.65 ; 2337.72,1706.93 ccw(c2354.14,1735.36) C36.2@2362.63,1703.65 ; 2357.72,1715 cw(c2357.72,1691.69) C36.2@2374.2,1708.17 ; 2357.72,1715 cw(c2357.72,1691.69) C36.2@2374.2,1708.17 ; 2357.72,1715 cw(c2357.72,1691.69) C36.2@2374.2,1708.17 ; C37.2@2750.88,1266.16 cw(c2750.88,1246.93) 2764.47,1260.53 ; C37.2@2750.88,1266.16 cw(c2750.88,1246.93) 2764.47,1260.53 ; C37.2@2750.88,1266.16 cw(c2750.88,1246.93) 2764.47,1260.53 ; 2769.39,1255.61 cw(c2743.79,1230) v1@2780,1230 ; 2769.39,1255.61 cw(c2743.79,1230) v1@2780,1230 ; 2769.39,1255.61 cw(c2743.79,1230) v1@2780,1230 ; 2774.19,1251.67 ccw(c2801.78,1259.06) v1@2787.5,1234.33 ; 2774.19,1251.67 ccw(c2801.78,1259.06) v1@2787.5,1234.33 ; 2774.19,1251.67 ccw(c2801.78,1259.06) v1@2787.5,1234.33 ; 2874.39,1365.61 ccw(c2900,1391.21) v1@2900,1355 ; 2874.39,1365.61 ccw(c2900,1391.21) v1@2900,1355 ; 2874.39,1365.61 ccw(c2900,1391.21) v1@2900,1355 ; 2878.33,1360.81 cw(c2870.94,1333.22) v1@2895.67,1347.5 ; 2878.33,1360.81 cw(c2870.94,1333.22) v1@2895.67,1347.5 ; 2878.33,1360.81 cw(c2870.94,1333.22) v1@2895.67,1347.5
  Bottom Layer w30: C9.2@1280,1045.47 1314.56,1045.47 1750.09,1481 2059,1481 2070,1470 2375,1470 ; C9.2@1291.67,1042.15 cw(c1324.58,1023.14) 1314.74,1059.85 ; v1(2785,1230) 2785,1240 2785,1300 2615,1470 2375,1470 ; v1(2300,1715) ccw(c2372.43,1715) 2321.21,1663.79 ; v1(2300,1715) ccw(c2372.43,1715) 2321.21,1663.79 ; v1(2300,1715) ccw(c2372.43,1715) 2321.21,1663.79 ; v1(2300,1715) 2300,1685 2390,1595 2390,1485 2375,1470 ; C37.2@2750.67,1271.19 cw(c2737.02,1225.19) v1@2785,1225.19 ; C37.2@2750.67,1271.19 cw(c2737.02,1225.19) v1@2785,1225.19 ; C37.2@2750.67,1271.19 cw(c2737.02,1225.19) v1@2785,1225.19 ; C9.2@1285.91,1052.13 ccw(c1285.91,1137.37) 1346.18,1077.09 cw(c1285.91,1137.37) C9.2@1285.91,1052.13
+1.8V: C1.2 C18.1 J2.1 R1.2 U1.23 U4.18 | length 2519.7
  Top Layer w20: v1(1480,1340) 1480,1275 v1(1590,1165)
  Bottom Layer w10: U1.23@1160,1345.47 1199.53,1345.47 1220,1325 ; C18.1@1277.56,715 1356.53,793.98 U4.18@1392.8,793.98 1428.98,793.98 1445,810 1445,1017.32 1590,1162.32 v1(1590,1165) ccw(c1595.79,1145.56) 1576.2,1150.81 ; C18.1@1277.56,727.72 ccw(c1277.56,758.42) 1299.27,736.71 ; C18.1@1277.56,727.72 ccw(c1277.56,758.42) 1299.27,736.71 ; C18.1@1277.56,727.72 ccw(c1277.56,758.42) 1299.27,736.71 ; C18.1@1288.31,716.97 cw(c1309.5,716.97) 1294.52,731.96 ; C18.1@1288.31,716.97 cw(c1309.5,716.97) 1294.52,731.96 ; C18.1@1288.31,716.97 cw(c1309.5,716.97) 1294.52,731.96 ; 1346.46,783.9 cw(c1366.22,764.14) U4.18@1366.22,792.09 ; 1346.46,783.9 cw(c1366.22,764.14) U4.18@1366.22,792.09 ; 1346.46,783.9 cw(c1366.22,764.14) U4.18@1366.22,792.09 ; 1358.03,789.89 ccw(c1355.24,800.32) U4.18@1364.58,794.92 ; 1358.03,789.89 ccw(c1355.24,800.32) U4.18@1364.58,794.92 ; 1358.03,789.89 ccw(c1355.24,800.32) U4.18@1364.58,794.92 ; U4.18@1419.37,795.87 ccw(c1419.37,823.62) 1438.99,803.99 ; U4.18@1419.37,795.87 ccw(c1419.37,823.62) 1438.99,803.99 ; U4.18@1419.37,795.87 ccw(c1419.37,823.62) 1438.99,803.99 ; U4.18@1421.01,793.03 cw(c1430.36,787.63) 1427.56,798.06 ; U4.18@1421.01,793.03 cw(c1430.36,787.63) 1427.56,798.06 ; U4.18@1421.01,793.03 cw(c1430.36,787.63) 1427.56,798.06 ; 1571.03,1143.35 ccw(c1549.39,1165) 1580,1165 cw(c1549.39,1165) 1571.03,1143.35 ; 1577.51,1149.82 cw(c1590,1137.33) 1590,1155 ccw(c1590,1137.33) 1577.51,1149.82
  Bottom Layer w20: 1220,1325 1315.47,1325 C1.2@1330,1339.53 ; C1.2@1330,1334.53 1335,1339.53 R1.2@1400,1339.53 v1@1480,1339.53 ; v1@1484.53,1339.53 1610,1465 ; 1272.96,1325 ccw(c1272.96,1385.66) C1.2@1315.85,1342.77 ; 1272.96,1325 ccw(c1272.96,1385.66) C1.2@1315.85,1342.77 ; 1272.96,1325 ccw(c1272.96,1385.66) C1.2@1315.85,1342.77 ; 1294.29,1330.32 cw(c1302.69,1315.76) C1.2@1315.33,1326.84 ; 1294.29,1330.32 cw(c1302.69,1315.76) C1.2@1315.33,1326.84 ; 1294.29,1330.32 cw(c1302.69,1315.76) C1.2@1315.33,1326.84 ; C1.2@1344.15,1326.29 cw(c1376.11,1294.32) 1376.11,1339.53 ; C1.2@1344.15,1326.29 cw(c1376.11,1294.32) 1376.11,1339.53 ; C1.2@1344.15,1326.29 cw(c1376.11,1294.32) 1376.11,1339.53 ; v1@1480,1345 ccw(c1480,1369.14) 1497.07,1352.07 ; v1@1480,1345 ccw(c1480,1369.14) 1497.07,1352.07 ; v1@1480,1345 ccw(c1480,1369.14) 1497.07,1352.07 ; 1581.06,1436.06 ccw(c1522.12,1495) J2.1@1605.47,1495 ; 1581.06,1436.06 ccw(c1522.12,1495) J2.1@1605.47,1495 ; 1581.06,1436.06 ccw(c1522.12,1495) J2.1@1605.47,1495 ; 1596.75,1462.46 cw(c1645.5,1449.4) J2.1@1624.81,1495.43 ; 1596.75,1462.46 cw(c1645.5,1449.4) J2.1@1624.81,1495.43 ; 1596.75,1462.46 cw(c1645.5,1449.4) J2.1@1624.81,1495.43 ; 1610,1465 ccw(c1601.28,1473.73) J2.1@1610.46,1481.96 ; 1610,1465 ccw(c1601.28,1473.73) J2.1@1610.46,1481.96 ; 1610,1465 ccw(c1601.28,1473.73) J2.1@1610.46,1481.96
+2.5V: C8.2 C26.2 C27.2 C28.2 C29.2 R4.2 R12.2 R14.2 R15.2 R20.2 U1.20 U2.48 U2.62 U2.120 U2.134 | length 8964.4
  Top Layer w10: v1@2157.71,1775.37 cw(c2160.3,1766.16) 2167.07,1772.93 cw(c2173.84,1779.7) v1@2164.63,1782.29 ; v1@2337.71,1950.37 cw(c2340.3,1941.16) 2347.07,1947.93 cw(c2353.84,1954.7) v1@2344.63,1957.29 ; v1(2740,1180) 2750,1190 2759.05,1190 U2.120@2803.22,1145.82 2854.05,1095 ; v1@2860.37,1097.71 ccw(c2851.16,1100.3) 2857.93,1107.07 ccw(c2864.7,1113.84) v1@2867.29,1104.63 ; v1@2149.41,1776.71 cw(c2142.34,1766.21) 2155,1766.21 ; v1@2149.41,1776.71 cw(c2142.34,1766.21) 2155,1766.21 ; v1@2149.41,1776.71 cw(c2142.34,1766.21) 2155,1766.21 ; v1@2150.17,1776.24 cw(c2139.27,1756.48) 2161.08,1762.32 ; v1@2150.17,1776.24 cw(c2139.27,1756.48) 2161.08,1762.32 ; v1@2150.17,1776.24 cw(c2139.27,1756.48) 2161.08,1762.32 ; 2155,1766.21 cw(c2167.66,1766.21) v1@2160.59,1776.71 ; 2155,1766.21 cw(c2167.66,1766.21) v1@2160.59,1776.71 ; 2155,1766.21 cw(c2167.66,1766.21) v1@2160.59,1776.71 ; 2155,1766.21 v1(2155,1785) ; 2155,1766.21 U2.62@2201.9,1719.3 2245,1676.21 v1(2245,1670) ; v1(2155,1785) ccw(c2200.37,1785) 2168.29,1752.92 ; v1(2155,1785) cw(c2138.51,1756.44) 2170.37,1764.98 ; v1(2155,1785) cw(c2138.51,1756.44) 2170.37,1764.98 ; v1(2155,1785) ccw(c2200.37,1785) 2168.29,1752.92 ; v1(2155,1785) cw(c2138.51,1756.44) 2170.37,1764.98 ; v1(2155,1785) ccw(c2200.37,1785) 2168.29,1752.92 ; 2161.08,1762.32 cw(c2182.88,1768.16) v1@2163.56,1779.83 ; 2161.08,1762.32 cw(c2182.88,1768.16) v1@2163.56,1779.83 ; 2161.08,1762.32 cw(c2182.88,1768.16) v1@2163.56,1779.83 ; v1@2165,1785 ccw(c2234.51,1785) U2.62@2185.36,1735.85 ; v1@2165,1785 ccw(c2234.51,1785) U2.62@2185.36,1735.85 ; v1@2165,1785 ccw(c2234.51,1785) U2.62@2185.36,1735.85 ; 2179.39,1746.19 cw(c2172.81,1742.39) U2.62@2180.15,1740.42 ; 2179.39,1746.19 cw(c2172.81,1742.39) U2.62@2180.15,1740.42 ; 2179.39,1746.19 cw(c2172.81,1742.39) U2.62@2180.15,1740.42 ; U2.62@2223.54,1697.67 cw(c2195.87,1670) v1@2235,1670 ; U2.62@2223.54,1697.67 cw(c2195.87,1670) v1@2235,1670 ; U2.62@2223.54,1697.67 cw(c2195.87,1670) v1@2235,1670 ; 2230.64,1686.28 ccw(c2254.2,1692.59) v1(2245,1670) ; 2230.64,1686.28 ccw(c2254.2,1692.59) v1(2245,1670) ; 2230.64,1686.28 ccw(c2254.2,1692.59) v1(2245,1670) ; v1@2335,1950 cw(c2335,1887.35) U2.48@2379.3,1931.65 ; v1@2335,1950 cw(c2335,1887.35) U2.48@2379.3,1931.65 ; v1@2335,1950 cw(c2335,1887.35) U2.48@2379.3,1931.65 ; v1(2335,1960) cw(c2335,1921.49) 2362.23,1948.72 ; v1(2335,1960) ccw(c2363.56,1976.49) 2355.02,1944.63 ; v1(2335,1960) ccw(c2363.56,1976.49) 2355.02,1944.63 ; v1(2335,1960) cw(c2335,1921.49) 2362.23,1948.72 ; v1(2335,1960) ccw(c2363.56,1976.49) 2355.02,1944.63 ; v1(2335,1960) cw(c2335,1921.49) 2362.23,1948.72 ; v1(2335,1960) 2350.95,1960 ; v1@2341.2,1952.15 cw(c2350.41,1940.48) 2354.25,1954.84 ; v1@2341.2,1952.15 cw(c2350.41,1940.48) 2354.25,1954.84 ; v1@2341.2,1952.15 cw(c2350.41,1940.48) 2354.25,1954.84 ; v1@2344,1955.64 cw(c2350.95,1952.28) 2350.95,1960 ; v1@2344,1955.64 cw(c2350.95,1952.28) 2350.95,1960 ; v1@2344,1955.64 cw(c2350.95,1952.28) 2350.95,1960 ; v1@2344,1964.36 ccw(c2350.95,1967.72) 2350.95,1960 ; v1@2344,1964.36 ccw(c2350.95,1967.72) 2350.95,1960 ; v1@2344,1964.36 ccw(c2350.95,1967.72) 2350.95,1960 ; v1@2344.29,1963.7 ccw(c2358.1,1969.2) 2354.25,1954.84 ; v1@2344.29,1963.7 ccw(c2358.1,1969.2) 2354.25,1954.84 ; v1@2344.29,1963.7 ccw(c2358.1,1969.2) 2354.25,1954.84 ; 2350.95,1960 U2.48@2396.78,1914.18 2430.95,1880 ; 2430.95,1880 cw(c2430.95,1841.88) v1@2461.88,1864.16 ; 2430.95,1880 cw(c2430.95,1841.88) v1@2461.88,1864.16 ; 2430.95,1880 cw(c2430.95,1841.88) v1@2461.88,1864.16 ; 2430.95,1880 2460,1880 v1(2470,1870) ; 2448.13,1875.39 ccw(c2454.68,1883.42) v1@2462.48,1876.59 ; 2448.13,1875.39 ccw(c2454.68,1883.42) v1@2462.48,1876.59 ; 2448.13,1875.39 ccw(c2454.68,1883.42) v1@2462.48,1876.59 ; 2450.48,1880 cw(c2450.48,1855.94) v1(2470,1870) ; 2450.48,1880 cw(c2450.48,1855.94) v1(2470,1870) ; 2450.48,1880 cw(c2450.48,1855.94) v1(2470,1870) ; U2.120@2825.7,1123.35 ccw(c2870,1167.65) v1@2870,1105 ; U2.120@2825.7,1123.35 ccw(c2870,1167.65) v1@2870,1105 ; U2.120@2825.7,1123.35 ccw(c2870,1167.65) v1@2870,1105 ; 2842.77,1106.28 ccw(c2870,1133.51) v1(2870,1095) ; 2842.77,1106.28 ccw(c2870,1133.51) v1(2870,1095) ; 2842.77,1106.28 ccw(c2870,1133.51) v1(2870,1095) ; 2849.98,1110.37 cw(c2841.44,1078.51) v1(2870,1095) ; 2849.98,1110.37 cw(c2841.44,1078.51) v1(2870,1095) ; 2849.98,1110.37 cw(c2841.44,1078.51) v1(2870,1095) ; 2850.75,1100.16 cw(c2846.9,1085.8) v1@2860.71,1091.3 ; 2850.75,1100.16 ccw(c2854.59,1114.52) v1@2863.8,1102.85 ; 2850.75,1100.16 cw(c2846.9,1085.8) v1@2860.71,1091.3 ; 2850.75,1100.16 ccw(c2854.59,1114.52) v1@2863.8,1102.85 ; 2850.75,1100.16 cw(c2846.9,1085.8) v1@2860.71,1091.3 ; 2850.75,1100.16 ccw(c2854.59,1114.52) v1@2863.8,1102.85 ; 2854.05,1095 cw(c2854.05,1087.28) v1@2861,1090.64 ; 2854.05,1095 ccw(c2854.05,1102.72) v1@2861,1099.36 ; 2854.05,1095 cw(c2854.05,1087.28) v1@2861,1090.64 ; 2854.05,1095 ccw(c2854.05,1102.72) v1@2861,1099.36 ; 2854.05,1095 ccw(c2854.05,1102.72) v1@2861,1099.36 ; 2854.05,1095 cw(c2854.05,1087.28) v1@2861,1090.64 ; 2854.05,1095 v1(2870,1095) ; v1@2945,1385 cw(c2945,1360.86) 2962.07,1377.93 ; v1@2945,1385 cw(c2945,1360.86) 2962.07,1377.93 ; v1@2945,1385 cw(c2945,1360.86) 2962.07,1377.93 ; v1(2945,1395) cw(c2941.49,1377.88) 2958.38,1382.4 ; v1(2945,1395) cw(c2941.49,1377.88) 2958.38,1382.4 ; v1(2945,1395) ccw(c2962.12,1398.51) 2957.6,1381.62 ; v1(2945,1395) ccw(c2962.12,1398.51) 2957.6,1381.62 ; v1(2945,1395) cw(c2941.49,1377.88) 2958.38,1382.4 ; v1(2945,1395) ccw(c2962.12,1398.51) 2957.6,1381.62 ; v1(2945,1395) 2998.1,1341.9 U2.134@2998.1,1340.7 3040,1298.79 3040,1285 v1(3060,1265) ; v1@2955,1395 ccw(c2979.14,1395) 2962.07,1377.93 ; v1@2955,1395 ccw(c2979.14,1395) 2962.07,1377.93 ; v1@2955,1395 ccw(c2979.14,1395) 2962.07,1377.93 ; 3042.93,1282.07 cw(c3025.86,1265) v1@3050,1265 ; 3042.93,1282.07 ccw(c3060,1299.14) v1@3060,1275 ; 3042.93,1282.07 cw(c3025.86,1265) v1@3050,1265 ; 3042.93,1282.07 ccw(c3060,1299.14) v1@3060,1275 ; 3042.93,1282.07 ccw(c3060,1299.14) v1@3060,1275 ; 3042.93,1282.07 cw(c3025.86,1265) v1@3050,1265 ; 3046.62,1277.6 ccw(c3063.51,1282.12) v1(3060,1265) ; 3046.62,1277.6 ccw(c3063.51,1282.12) v1(3060,1265) ; 3046.62,1277.6 ccw(c3063.51,1282.12) v1(3060,1265) ; 3047.4,1278.38 cw(c3042.88,1261.49) v1(3060,1265) ; 3047.4,1278.38 cw(c3042.88,1261.49) v1(3060,1265) ; 3047.4,1278.38 cw(c3042.88,1261.49) v1(3060,1265)
  Top Layer w20: v1(1460,1435) 1615,1280 v1(1635,1280) ; 1620.22,1287.95 ccw(c1629.45,1297.19) v1@1633.46,1284.76 ; R15.2@2494.53,735 2490,739.53 v1(2490,815) 2590,915 v1(2590,960) ; R14.2@3179.12,1299.12 3218.24,1260 v1(3225,1260) ; 3210.22,1267.95 ccw(c3219.45,1277.19) v1@3223.46,1264.76 ; 1592.32,1302.68 ccw(c1635,1345.36) v1@1635,1285 ; 1592.32,1302.68 ccw(c1635,1345.36) v1@1635,1285 ; 1592.32,1302.68 ccw(c1635,1345.36) v1@1635,1285 ; 1613.33,1290.81 cw(c1605.94,1263.22) v1@1630.67,1277.5 ; 1613.33,1290.81 cw(c1605.94,1263.22) v1@1630.67,1277.5 ; 1613.33,1290.81 cw(c1605.94,1263.22) v1@1630.67,1277.5 ; 2490,758.99 ccw(c2514.58,758.99) R15.2@2497.2,741.61 ; 2490,758.99 ccw(c2514.58,758.99) R15.2@2497.2,741.61 ; 2490,758.99 ccw(c2514.58,758.99) R15.2@2497.2,741.61 ; 3203.33,1270.81 cw(c3195.94,1243.22) v1@3220.67,1257.5 ; 3203.33,1270.81 cw(c3195.94,1243.22) v1@3220.67,1257.5 ; 3203.33,1270.81 cw(c3195.94,1243.22) v1@3220.67,1257.5 ; 3204.93,1273.31 ccw(c3225,1293.39) v1@3225,1265 ; 3204.93,1273.31 ccw(c3225,1293.39) v1@3225,1265 ; 3204.93,1273.31 ccw(c3225,1293.39) v1@3225,1265
  Bottom Layer w10: U1.20@1160,1404.53 1189.53,1404.53 1200,1415
  Bottom Layer w20: 1200,1415 1200.84,1415.84 1244.16,1415.84 1254.53,1405.47 C8.2@1330,1405.47 R4.2@1395,1405.47 1430.47,1405.47 v1(1460,1435) 1485,1460 1485,1475 1555,1545 1815,1545 2040,1770 2140,1770 v1(2155,1785) 2155,1825 2190,1860 2235,1860 v1(2335,1960) ; v1(1635,1280) 1805,1450 1935,1450 2216.25,1168.75 2286.25,1168.75 2495,960 2820,960 2910,1050 ; 2138.92,1780.17 ccw(c2138.92,1793.23) v1@2150.55,1787.28 ; v1(2245,1670) 2265.51,1649.49 C27.2@2265.51,1614.49 ; R12.2@2449.53,815 v1(2490,815) ; v1(2470,1870) 2485,1870 C26.2@2510.51,1844.49 ; C29.2@2704.49,1215.51 v1(2740,1180) ; v1(2870,1095) 2870,1090 2910,1050 ; C28.2@2914.49,1435.51 2945,1405 v1(2945,1395) ; v1(3060,1265) v1@3065,1265 ; v1(3225,1260) 3220,1265 v1@3065,1265 ; 1295.96,1405.47 cw(c1295.96,1377.34) C8.2@1315.85,1397.23 ; 1295.96,1405.47 ccw(c1295.96,1433.61) C8.2@1315.85,1413.71 ; 1295.96,1405.47 cw(c1295.96,1377.34) C8.2@1315.85,1397.23 ; 1295.96,1405.47 ccw(c1295.96,1433.61) C8.2@1315.85,1413.71 ; 1295.96,1405.47 ccw(c1295.96,1433.61) C8.2@1315.85,1413.71 ; 1295.96,1405.47 cw(c1295.96,1377.34) C8.2@1315.85,1397.23 ; C8.2@1344.15,1397.23 cw(c1364.04,1377.34) 1364.04,1405.47 ; C8.2@1344.15,1397.23 cw(c1364.04,1377.34) 1364.04,1405.47 ; C8.2@1344.15,1397.23 cw(c1364.04,1377.34) 1364.04,1405.47 ; C8.2@1344.15,1413.71 ccw(c1364.04,1433.61) 1364.04,1405.47 ; C8.2@1344.15,1413.71 ccw(c1364.04,1433.61) 1364.04,1405.47 ; C8.2@1344.15,1413.71 ccw(c1364.04,1433.61) 1364.04,1405.47 ; 2106.72,1770 ccw(c2106.72,1833.28) v1@2151.46,1788.54 ; 2106.72,1770 ccw(c2106.72,1833.28) v1@2151.46,1788.54 ; 2106.72,1770 ccw(c2106.72,1833.28) v1@2151.46,1788.54 ; 2132.03,1777.32 cw(c2146.31,1752.58) v1@2153.71,1780.17 ; 2132.03,1777.32 cw(c2146.31,1752.58) v1@2153.71,1780.17 ; 2132.03,1777.32 cw(c2146.31,1752.58) v1@2153.71,1780.17 ; C27.2@2265.51,1633.12 ccw(c2284.14,1633.12) C27.2@2270.97,1619.94 ; C27.2@2265.51,1633.12 ccw(c2284.14,1633.12) C27.2@2270.97,1619.94 ; C27.2@2265.51,1633.12 ccw(c2284.14,1633.12) C27.2@2270.97,1619.94 ; v1@2470,1865 cw(c2470,1816.72) C26.2@2504.14,1850.86 ; v1@2470,1865 cw(c2470,1816.72) C26.2@2504.14,1850.86 ; v1@2470,1865 cw(c2470,1816.72) C26.2@2504.14,1850.86 ; v1@2474.33,1872.5 ccw(c2499.06,1886.78) 2491.67,1859.19 ; v1@2474.33,1872.5 ccw(c2499.06,1886.78) 2491.67,1859.19 ; v1@2474.33,1872.5 ccw(c2499.06,1886.78) 2491.67,1859.19 ; 2490.37,1858.81 cw(c2476.2,1834.28) C26.2@2503.57,1841.61 ; 2490.37,1858.81 cw(c2476.2,1834.28) C26.2@2503.57,1841.61 ; 2490.37,1858.81 cw(c2476.2,1834.28) C26.2@2503.57,1841.61 ; v1@2875,1095 ccw(c2899.14,1095) 2882.07,1077.93 ; v1@2875,1095 ccw(c2899.14,1095) 2882.07,1077.93 ; v1@2875,1095 ccw(c2899.14,1095) 2882.07,1077.93 ; 2910,1050 3065,1205 v1@3065,1265 ; 2929.39,1420.61 cw(c2903.79,1395) v1@2940,1395 ; 2929.39,1420.61 cw(c2903.79,1395) v1@2940,1395 ; 2929.39,1420.61 cw(c2903.79,1395) v1@2940,1395 ; 2934.19,1416.67 ccw(c2961.78,1424.06) v1@2947.5,1399.33 ; 2934.19,1416.67 ccw(c2961.78,1424.06) v1@2947.5,1399.33 ; 2934.19,1416.67 ccw(c2961.78,1424.06) v1@2947.5,1399.33 ; v1@3056.46,1261.46 cw(c3035.86,1240.86) 3065,1240.86 ; v1@3056.46,1261.46 cw(c3035.86,1240.86) 3065,1240.86 ; v1@3056.46,1261.46 cw(c3035.86,1240.86) 3065,1240.86 ; 3200.86,1265 cw(c3200.86,1235.86) v1@3221.46,1256.46 ; 3200.86,1265 cw(c3200.86,1235.86) v1@3221.46,1256.46 ; 3200.86,1265 cw(c3200.86,1235.86) v1@3221.46,1256.46